# Altium PCB vert.PcbDoc (part 2 of 2)
Units mm, origin at the board's own origin, x right, y up, seen from the top; angles counter-clockwise.
Board outline 145 x 85 mm, 2 copper layers (Top Layer, Bottom Layer); 219 components, 187 nets, 800 pads, 113 vias.
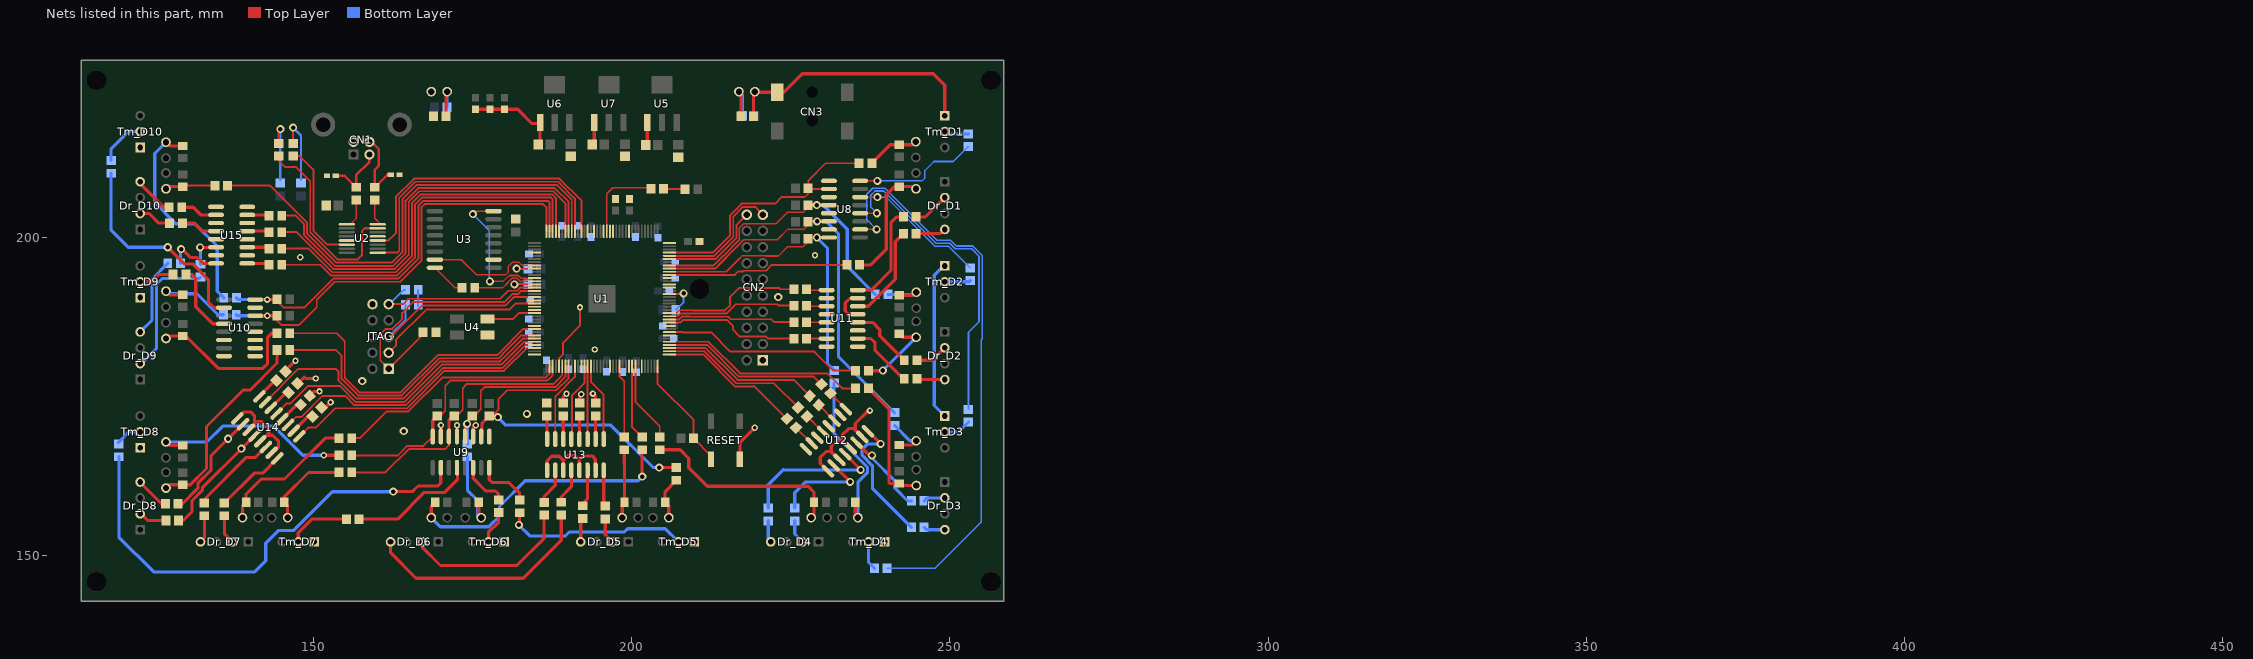
[diagram p2: the nets of this part, all layers, seen from the top]

## Via types
v1: diameter 1, hole 0.5, Top Layer to Bottom Layer, 71 vias
v2: diameter 1.27, hole 0.711, Top Layer to Bottom Layer, 42 vias

## Nets (pads, with @x,y where several pads share a name; then routed paths per layer and width w, separated by ;. In a path a pad name is that pad's centre, name@x,y a point inside that pad or via, vN(x,y) a via of type N, cw(c..) or ccw(c..) an arc to the next point about the centre after c; other vN are vias at no path point) (continued)
CLK: U1.23 U4.3 | length 7.8
  Top Layer w0.3: U4.3@177.325,187.2 181.325,187.2 182.275,188.15 U1.23@184.725,188.15
CONF_DONE: R3.2 U1.92 | length 5.3
  Top Layer w0.3: U1.92@205.925,191.15 v2@208.15,191.15
  Bottom Layer w0.3: R3.2@206.925,188.65 208.15,189.875 v2(208.15,191.25)
DATA0: R2.1 U1.13 | length 10.2
  Top Layer w0.25: R2.1@175.325,192.1 179.7,192.1 180.615,193.015 180.615,193.048 181.177,193.61 181.973,193.61 182.433,193.15 U1.13@184.725,193.15
DCLK: U1.12 U3.16 | length 22.5
  Top Layer w0.25: v2(175.05,203.7) 175.52,204.17 U3.16@178.275,204.17 ; v2(177.7,193.125) 179.786,193.125 180.721,194.06 182.159,194.06 182.569,193.65 U1.12@184.725,193.65
  Bottom Layer w0.25: v2(175.05,203.7) 177.625,201.125 v2@177.625,193.225
dir_1: R24.1 U1.85 | length 20.4
  Top Layer w0.3: U1.85@205.925,187.65 207.239,187.65 207.683,188.094 209.332,188.094 209.357,188.069 214.894,188.069 216.365,189.54 222.9,189.54 223.123,189.317 R24.1@225.475,189.317
dir_2: R31.1 U1.83 | length 21.3
  Top Layer w0.3: U1.83@205.925,186.65 207.653,186.65 208.097,187.094 208.918,187.094 208.943,187.069 214.949,187.069 215.888,186.13 215.888,185.588 217.015,184.46 221.107,184.46 221.417,184.15 R31.1@225.475,184.15
dir_3: R25.1 U1.75 | length 25.2
  Top Layer w0.3: U1.75@205.925,182.65 211.636,182.65 216.65,177.636 225.486,177.636 R25.1@227.979,175.143
dir_4: R32.1 U1.73 | length 22.6
  Top Layer w0.3: U1.73@205.925,181.65 211.218,181.65 216.268,176.6 219.344,176.6 R32.1@224.39,171.554
DIR_5: U1.50 U13.3 | length 11.5
  Top Layer w0.3: U13.3@193.055,168.35 193.05,168.355 193.05,175.852 193.075,175.877 U1.50@193.075,179.8
dir_6: U1.46 U13.7 | length 12.7
  Top Layer w0.3: U13.7@187.975,168.35 187.975,175.025 191.075,178.125 U1.46@191.075,179.8
DIR_7: U1.34 U14.1 | length 42.7
  Top Layer w0.3: U14.1@147.775,168.773 149.152,170.15 150.375,170.15 153.423,173.198 164.705,173.198 170.557,179.05 179.918,179.05 183.518,182.65 U1.34@184.725,182.65
dir_8: U1.31 U14.7 | length 51.2
  Top Layer w0.3: U14.7@142.386,174.161 147.601,179.375 153.5,179.375 153.9,178.975 153.9,177.588 156.789,174.698 164.084,174.698 169.936,180.55 179.296,180.55 180.175,181.429 180.175,181.447 182.878,184.15 U1.31@184.725,184.15
dir_9: R38.1 U1.141 | length 60
  Top Layer w0.3: R38.1@145,198.275 149.236,198.275 152.936,194.575 162.914,194.575 165.46,197.121 165.46,205.424 166.828,206.793 187.493,206.793 188.08,206.205 188.08,205.45 188.075,205.445 U1.141@188.075,201
dir_10: R44.1 U1.137 | length 64.8
  Top Layer w0.3: R44.1@145,203.475 147.175,203.475 148.475,202.175 148.475,200.45 153.35,195.575 162.5,195.575 164.46,197.535 164.46,205.839 166.414,207.793 187.907,207.793 190.075,205.625 U1.137@190.075,201
DIR_H1: R3_D1.1 U11.14 | length 15.4
  Top Layer w0.5: U11.14@235.525,189.23 237.18,189.23 241.425,193.475 241.425,199.375 R3_D1.1@242.7,200.65
DIR_H2: R3_D2.1 U11.10 | length 10.6
  Top Layer w0.5: U11.10@235.525,184.15 237.575,184.15 238.25,183.475 238.25,182.275 242.675,177.85 R3_D2.1@242.825,177.85
DIR_H3: R3_D3.1 U12.16 | length 21.6
  Top Layer w0.5: U12.16@237.132,169.588 v2(239.121,167.6) v2@239.175,167.6
  Bottom Layer w0.5: v2(239.121,167.6) 237.075,167.6 236.212,166.737 236.212,165.781 237.825,164.169 237.825,160.6 R3_D3.1@243.95,154.475
DIR_H4: R3_D4.1 U12.12 | length 22.7
  Top Layer w0.5: U12.12@233.54,165.996 235.962,163.575 v2(235.962,163.508)
  Bottom Layer w0.5: R3_D4.1@221.45,157.5 221.45,161.175 223.825,163.55 223.867,163.508 v2(235.962,163.508)
DIR_H5: R3_D5.1 U13.14 | length 6
  Top Layer w0.5: R3_D5.1@192,157.9 193.055,158.955 U13.14@193.055,163.45
DIR_H6: R3_D6.1 U13.12 | length 5.7
  Top Layer w0.5: R3_D6.1@188.925,158.425 188.925,159.25 190.515,160.84 U13.12@190.515,163.45
DIR_H7: R3_D7.1 U14.14 | length 13.7
  Top Layer w0.5: R3_D7.1@132.85,158.3 132.85,158.9 139.42,165.47 140.88,165.47 U14.14@142.514,167.104
DIR_H8: R3_D8.1 U14.10 | length 17.3
  Top Layer w0.5: R3_D8.1@128.7,158.15 129.375,158.15 131.825,160.6 131.825,161.385 133.875,163.435 133.875,165.725 v2@136.625,168.475 ; v2(136.575,168.4) 138.871,170.696 U14.10@138.922,170.696
DIR_H9: R3_D9.1 U15.16 | length 8.7
  Top Layer w0.5: v2(129.181,198.21) 129.39,198.21 130.725,196.875 131.75,196.875 132.67,195.955 U15.16@134.675,195.955
  Bottom Layer w0.5: R3_D9.1@129.075,195.975 129.075,198.103 v2(129.181,198.21)
DIR_H10: R3_D10.1 U15.10 | length 5.9
  Top Layer w0.5: R3_D10.1@129.275,204.775 131.075,204.775 132.275,203.575 U15.10@134.675,203.575
FT_RxLed: RX.1 U2.14 | length 20.4
  Top Layer w0.3: RX.1@146.77,212.865 RX.1@146.77,212.815 147.86,212.815 149.975,210.7 149.975,201.071 152.136,198.91 U2.14@155.75,198.91
FT_TxLed: TX.1 U2.7 | length 32.1
  Top Layer w0.3: TX.1@144.52,212.815 144.52,212.08 145.513,211.088 147.238,211.088 149.475,208.85 149.475,200.864 153.739,196.6 156.975,196.6 157.6,197.225 157.6,201.025 158.037,201.462
  Top Layer w0.381: 158.037,201.462 U2.7@160.075,201.462 ; U2.7@160.075,201.45 U2.7@160.6,201.45
FTDI_RX: U1.133 U2.4 | length 45.1
  Top Layer w0.3: U2.4@160.6,199.545 161.727,199.545 162.067,199.885 162.09,199.885 162.94,200.735 162.94,206.44 165.793,209.293 188.632,209.293 192.075,205.85 U1.133@192.075,201
FTDI_TX: U1.135 U2.1 | length 46.2
  Top Layer w0.3: U2.1@160.6,197.64 163.15,197.64 163.46,197.95 163.46,206.253 166,208.793 188.425,208.793 191.075,206.143 U1.135@191.075,201
GND: C1.2 C2.2 C3.2 C4.2 C5.2 C18.2 C19.1 C20.2 C21.2 C22.1 C23.2 C24.2 C25.2 C26.2 C27.2 C28.2 C29.1 C30.2 C31.1 C32.2 C33.2 C34.1 C35.1 C36.1 C37.2 C38.1 C39.1 C40.1 C41.1 C42.1 C43.1 C44.1 C45.1 C46.1 C47.1 C48.1 CN1.4 CN2.1 JTAG.10 LD_PWR_5.2 LD_PWR_5_n.2 R7.1 R20.2 R23.1 R26.1 R30.1 R33.1 R34.1 R37.1 R40.1 R43.1 RESET.1 U1.4 U1.19 U1.21 U1.22 U1.27 U1.36 U1.41 U1.48 U1.57 U1.63 U1.79 U1.82 U1.94 U1.95 U1.97 U1.108 U1.118 U1.123 U1.131 U1.140 U2.5 U2.13 U3.10 U4.2 U5.1 U6.1 U7.1 U8.9 U8.11 U8.13 U8.15 U9.9 U9.11 U9.13 U9.15 U10.9 U10.11 U10.15 U11.2 U11.4 U11.6 U11.8 U12.2 U12.4 U12.6 U12.8 U15.2 U15.4 U15.6 U15.8 | length 58.5
  Top Layer w0.3: U1.41@188.575,179.8 188.575,181.075 188.6,181.075 189.2,181.675 189.2,183.525 191.875,186.2 v1(191.875,189.05)
  Top Layer w0.5: R43.1@145.565,178.991 145.565,179.065 v1(147.15,180.65) ; R40.1@147.492,177.064 148.528,178.1 148.753,177.875 v1(150.35,177.875) ; R37.1@149.401,175.154 150.097,175.85 v1(150.925,175.85) ; R34.1@151.257,173.298 151.823,173.298 v1(152.675,174.15) ; U9.15@170,168.75 170.008,168.758 v1(170.008,170.533) v1@170.008,170.617 ; v1@172.533,170.617 v1(172.533,170.533) 172.533,168.757 U9.13@172.54,168.75 ; U9.11@175.08,168.75 175.08,170.105 v1(175.5,170.525) ; C1.2@175.475,220.175 C2.2@177.725,220.175 C3.2@179.975,220.175 182.075,220.175 184.325,217.925 U6.1@185.6,217.925 ; C26.2@185.275,214.625 185.6,214.95 U6.1@185.6,217.925 ; U6.1@185.625,217.925 U6.1@185.6,217.925 ; R30.1@189.25,174 189.25,174.975 v1(189.75,175.475) ; R26.1@191.8,174 191.8,175.125 v1(192.075,175.4) ; C24.2@193.8,214.625 194.1,214.925 U7.1@194.1,218.125 ; v1(193.9,175.5) 194.325,175.075 R23.1@194.325,174 ; C5.2@202.175,214.55 202.45,214.825 U5.1@202.45,218.125 U5.1@202.45,218.425 ; RESET.1@217,165.15 217,167.8 v1(219.325,170.125)
  other v1: 194.2,182.425 147.9,196.925 228.8,197.25
  other v2: 164.175,169.6 183.525,172.3 157.65,177.45 223.025,190.675
GND_H: CN3.1 LD_PWR_12.2 LD_PWR_12_n.2 Tm_D1.1 Tm_D2.1 Tm_D3.1 Tm_D4.1 Tm_D5.1 Tm_D6.1 Tm_D7.1 Tm_D8.1 Tm_D9.1 Tm_D10.1 U11.9 U11.11 U11.13 U11.15 U12.9 U12.11 U12.13 U12.15 U13.9 U13.11 U13.13 U13.15 U14.9 U14.11 U14.13 U14.15 U15.9 U15.11 U15.13 U15.15 | length 127.3
  Top Layer w0.5: U14.9@138.024,171.594 139.055,172.625 140.1,172.625 140.7,172.025 140.7,170.7 U14.11@139.85,169.85 ; U14.11@139.82,169.798 141.097,171.075 141.9,171.075 143,169.975 143,169.325 142.625,168.95 143.55,168.95 144.5,168 144.5,167.15 U14.15@143.875,166.525 ; U13.9@186.705,163.45 186.705,164.955 187.4,165.65 188.6,165.65 189.245,165.005 ; U13.11@189.245,163.45 189.245,165.005 ; U13.11@189.275,163.2 U13.11@189.275,163.45 ; U13.13@191.725,163.4 191.725,165.15 191.125,165.75 189.975,165.75 189.245,165.02 189.245,165.005 ; U13.13@191.785,163.45 191.785,165.185 192.3,165.7 193.775,165.7 194.275,165.2 U13.15@194.275,163.35 ; LD_PWR_12.2@219.15,219.1 219.15,222.75 LD_PWR_12_n.2@219.35,222.95 219.45,222.85 CN3.1@222.875,222.85 223.875,222.85 226.8,225.775 247.4,225.775 249.2,223.975 Tm_D1.1@249.2,219.175 ; U12.9@230.846,163.302 229.625,164.523 229.625,165.475 230.525,166.375 231.275,166.375 U12.11@232.35,165.3 ; U12.11@232.642,165.098 231.35,166.39 231.35,167.2 232.2,168.05 233.282,168.05 ; U12.13@234.438,166.894 233.282,168.05 ; U11.15@235.175,190.45 234.25,190.45 233.55,189.75 233.55,188.475 234.065,187.96 U11.13@235.525,187.96 ; U12.15@236.05,168.85 234.9,170 234.1,170 233.1,169 233.1,168.232 233.282,168.05 ; U12.15@236.234,168.69 235.125,169.8 235.125,170.8 237.15,172.825 v1(237.425,172.825)
  Bottom Layer w0.5: Tm_D2.1@249.1,195.725 249.1,195.65 247.55,194.1 247.55,173.625 Tm_D3.1@249.2,171.975
GPIO0: CN2.20 U1.103 | length 16
  Top Layer w0.3: U1.103@206.2,196.65 213.164,196.65 216.455,199.941 216.455,201.98 CN2.20@218.08,203.605
GPIO1: CN2.19 U1.104 | length 20.3
  Top Layer w0.3: U1.104@205.925,197.15 212.957,197.15 215.955,200.148 215.955,203.323 217.482,204.85 219.375,204.85 CN2.19@220.62,203.605
JTAG_TCK: JTAG.1 R20.1 U1.16 | length 41.6
  Top Layer w0.3: R20.1@167.225,185.125 167.225,184.825 JTAG.1@161.795,179.395 160.475,180.715 160.475,184.817 161.308,185.65 162.375,185.65 163.925,187.2 163.925,188.15 165.675,189.9 180.018,189.9 181.283,191.165 182.19,191.165 182.675,191.65 U1.16@184.725,191.65
JTAG_TDI: JTAG.9 R17.1 U1.15 | length 27.8
  Top Layer w0.3: JTAG.9@161.795,189.555 164.055,189.555 164.9,190.4 179.35,190.4 180.615,191.665 181.983,191.665 182.468,192.15 U1.15@184.725,192.15
  Bottom Layer w0.3: JTAG.9@161.75,189.4 JTAG.9@161.905,189.555 ; JTAG.9@161.795,189.555 JTAG.9@161.905,189.555 ; R17.1@164.4,191.8 164.15,191.8 JTAG.9@161.905,189.555
JTAG_TDO: JTAG.3 U1.20 | length 26.6
  Top Layer w0.3: JTAG.3@161.795,181.935 161.835,181.935 162.95,183.05 162.95,183.925 167.725,188.7 180.75,188.7 181.7,189.65 U1.20@184.725,189.65
JTAG_TMS: JTAG.5 R6.1 U1.18 | length 31.3
  Top Layer w0.3: JTAG.5@161.795,184.475 162.2,184.475 167.075,189.35 180.175,189.35 181.475,190.65 U1.18@184.725,190.65
  Bottom Layer w0.3: JTAG.5@162,184.675 164.45,187.125 R6.1@164.45,189.425
LED_DR1: R14_D1.1 U1.98 | length 28.6
  Top Layer w0.3: U1.98@205.925,194.15 216.2,194.15 216.75,194.7 217.483,194.7 217.593,194.81 221.107,194.81 222.022,195.725 R14_D1.1@233.825,195.725
LED_DR2: R14_D2.1 U1.80 | length 31.8
  Top Layer w0.3: U1.80@205.925,185.15 208.051,185.15 208.082,185.119 212.481,185.119 215.49,182.11 228.7,182.11 231.71,179.1 R14_D2.1@235.2,179.1
LED_DR3: R14_D3.1 U1.77 | length 32.3
  Top Layer w0.3: U1.77@205.925,183.65 212.05,183.65 217.043,178.657 230.718,178.657 233.05,176.325 R14_D3.1@235.2,176.325
LED_DR4: R14_D4.1 U1.65 | length 12.7
  Top Layer w0.3: U1.65@200.575,179.8 200.575,174.225 204.4,170.4 R14_D4.1@204.4,168.675
LED_DR5: R14_D5.1 U1.60 | length 11.4
  Top Layer w0.3: U1.60@198.075,179.8 198.075,178.2 198.825,177.45 R14_D5.1@198.825,168.675
LED_DR6: R14_D6.1 U1.64 | length 11.8
  Top Layer w0.3: U1.64@200.075,179.8 200.075,170.225 R14_D6.1@201.625,168.675
LED_DR7: R14_D7.1 U1.38 | length 36.5
  Top Layer w0.3: R14_D7.1@156,168.5 157.275,168.5 161.473,172.698 164.912,172.698 170.239,178.025 186.5,178.025 187.075,178.6 U1.38@187.075,179.8
LED_DR8: R14_D8.1 U1.30 | length 47.5
  Top Layer w0.3: R14_D8.1@146.25,182.35 153.5,182.35 154.4,181.45 154.4,177.795 156.997,175.198 163.877,175.198 169.728,181.05 179.089,181.05 179.675,181.636 179.675,181.654 182.671,184.65 U1.30@184.725,184.65
LED_DR9: R14_D9.1 U1.28 | length 49.8
  Top Layer w0.3: R14_D9.1@146.25,184.975 153.625,184.975 154.9,183.7 154.9,178.002 157.204,175.698 163.67,175.698 169.521,181.55 178.882,181.55 179.175,181.843 179.175,181.861 182.964,185.65 U1.28@184.725,185.65
LED_DR10: R14_D10.1 U1.136 | length 76
  Top Layer w0.3: R14_D10.1@136.475,208.175 143.182,208.175 148.975,202.382 148.975,200.657 153.557,196.075 162.292,196.075 163.96,197.743 163.96,206.046 166.207,208.293 188.218,208.293 190.575,205.936 U1.136@190.575,201
led_dr11: U1.129
led_dr12: U1.124
LPC1758_LED0: R15.1 U1.125 | length 13.3
  Top Layer w0.3: U1.125@196.075,201 196.075,206.875 197.05,207.85 202.825,207.85 R15.1@203,207.675
NCONFIG: R4.2 U1.14 | length 5.3
  Top Layer w0.25: v2(181.575,192.65) U1.14@184.725,192.65
  Bottom Layer w0.25: v2(181.575,192.65) R4.2@183.725,192.65
NCSO: U1.8 U3.7 | length 18.1
  Top Layer w0.25: U3.7@169.075,196.55 173.2,196.55 175.55,194.2 180.225,194.2 180.625,194.6 180.625,195.5 181.235,196.11 182.298,196.11 182.758,195.65 U1.8@184.725,195.65
NetACT_D1_2: ACT_D1.2 ACT_n_D1.2 R14_D1.2 | length 19.1
  Top Layer w0.5: R14_D1.2@235.825,195.725 237.55,195.725 240,198.175 240,206.754 241.271,208.025 ACT_D1.2@242.05,208.025 244.325,208.025 ACT_n_D1.2@244.675,207.675
NetACT_D2_2: ACT_D2.2 ACT_n_D2.2 R14_D2.2 | length 12
  Top Layer w0.5: R14_D2.2@237.2,179.1 v2@239.175,179.1 ; ACT_D2.2@242.05,184.9 242.6,184.35 ACT_n_D2.2@244.425,184.35
  Bottom Layer w0.5: v2(239.475,179.125) ACT_n_D2.2@244.7,184.35
NetACT_D3_2: ACT_D3.2 ACT_n_D3.2 R14_D3.2 | length 20.6
  Top Layer w0.5: R14_D3.2@237.2,176.325 240.425,173.1 240.425,161.5 240.55,161.375 ACT_D3.2@242.05,161.375 242.375,161.05 ACT_n_D3.2@244.725,161.05
NetACT_D4_2: ACT_D4.2 ACT_n_D4.2 R14_D4.2 | length 32.1
  Top Layer w0.5: R14_D4.2@204.4,166.675 207.6,166.675 208.975,165.3 208.975,163.85 211.9,160.925 227.725,160.925 228.65,160 ACT_D4.2@228.65,158.45 228.65,156.45 ACT_n_D4.2@228.2,156
NetACT_D5_2: ACT_D5.2 ACT_n_D5.2 R14_D5.2 | length 10
  Top Layer w0.5: ACT_n_D5.2@198.5,156 198.5,158.1 ACT_D5.2@198.85,158.45 198.85,164.4 198.825,164.425 198.825,165.825
NetACT_D6_2: ACT_D6.2 ACT_n_D6.2 R14_D6.2 | length 45.2
  Top Layer w0.5: ACT_n_D6.2@168.5,156 168.5,157.825 ACT_D6.2@169.125,158.45 ; R14_D6.2@201.625,166.675 201.625,162.475 v2(201.65,162.45)
  Bottom Layer w0.5: ACT_n_D6.2@168.5,156 169.925,154.575 177.55,154.575 179.225,156.25 179.225,157.75 183.275,161.8 201,161.8 v2(201.65,162.45) ; ACT_n_D6.2@168.6,156 ACT_n_D6.2@168.9,156.3
NetACT_D7_2: ACT_D7.2 ACT_n_D7.2 R14_D7.2 | length 21.4
  Top Layer w0.5: ACT_n_D7.2@138.825,156 ACT_D7.2@138.825,157.875 ; ACT_D7.2@139.4,158.45 139.4,159.725 141.75,162.075 145.425,162.075 151.85,168.5 R14_D7.2@154,168.5
NetACT_D8_2: ACT_D8.2 ACT_n_D8.2 R14_D8.2 | length 31.5
  Top Layer w0.5: ACT_n_D8.2@126.8,160.65 127.325,161.175 ACT_D8.2@129.45,161.175 130.625,161.175 133.175,163.725 133.175,170.325 138.9,176.05 140,176.05 144.25,180.3 R14_D8.2@144.25,182.35
NetACT_D9_2: ACT_D9.2 ACT_n_D9.2 R14_D9.2 | length 24.4
  Top Layer w0.5: ACT_n_D9.2@126.8,184.15 127.2,184.55 ACT_D9.2@129.45,184.55 129.9,184.55 135,179.45 142,179.45 142.775,180.225 142.775,184.325 143.425,184.975 R14_D9.2@144.25,184.975
NetACT_D10_2: ACT_D10.2 ACT_n_D10.2 R14_D10.2 | length 8.5
  Top Layer w0.3: ACT_D10.2@129.45,208.025 129.6,208.175 R14_D10.2@134.475,208.175
  Top Layer w0.5: ACT_n_D10.2@126.8,207.675 127.15,208.025 ACT_D10.2@129.45,208.025
  Bottom Layer w0.5: ACT_n_D10.2@126.8,207.675 ACT_n_D10.2@127.225,208.1
NetDr_D1_2: Dr_D1.2 R2_D1.2 | length 6.1
  Top Layer w0.5: R2_D1.2@244.7,203.275 246.175,203.275 Dr_D1.2@249.2,206.3
  Bottom Layer w0.25: Dr_D1.2@248.85,206.3 Dr_D1.2@249.2,206.3
NetDr_D1_4: Dr_D1.4 R3_D1.2 | length 4.8
  Top Layer w0.5: R3_D1.2@244.7,200.65 248.55,200.65 Dr_D1.4@249.2,201.3
NetDr_D2_2: Dr_D2.2 R2_D2.2 | length 5.2
  Top Layer w0.5: R2_D2.2@244.825,180.75 247.25,180.75 Dr_D2.2@249.2,182.7
NetDr_D2_4: Dr_D2.4 R3_D2.2 | length 4.4
  Top Layer w0.5: R3_D2.2@244.825,177.85 244.975,177.7 Dr_D2.4@249.2,177.7
NetDr_D3_2: Dr_D3.2 R2_D3.2 | length 3.4
  Bottom Layer w0.5: R2_D3.2@245.95,158.625 246.425,159.1 Dr_D3.2@249.2,159.1
NetDr_D3_4: Dr_D3.4 R3_D3.2 | length 3.4
  Bottom Layer w0.5: R3_D3.2@245.95,154.475 246.325,154.1 Dr_D3.4@249.2,154.1
NetDr_D4_2: Dr_D4.2 R2_D4.2 | length 3.8
  Bottom Layer w0.5: R2_D4.2@225.625,155.5 225.625,153.425 Dr_D4.2@226.85,152.2
NetDr_D4_4: Dr_D4.4 R3_D4.2 | length 3.5
  Bottom Layer w0.5: R3_D4.2@221.45,155.5 221.45,152.6 Dr_D4.4@221.85,152.2
NetDr_D5_2: Dr_D5.2 R2_D5.2 | length 4.1
  Top Layer w0.5: R2_D5.2@195.85,155.8 195.85,153.325 Dr_D5.2@196.975,152.2
NetDr_D5_4: Dr_D5.4 R3_D5.2 | length 3.8
  Top Layer w0.5: Dr_D5.4@191.975,152.25 Dr_D5.4@191.975,152.2 192,152.225 R3_D5.2@192,155.9
NetDr_D6_2: Dr_D6.2 R2_D6.2 | length 26.6
  Top Layer w0.5: Dr_D6.2@167.1,152.2 167.1,151.325 169.95,148.475 181.95,148.475 186.225,152.75 R2_D6.2@186.225,156.4
NetDr_D6_4: Dr_D6.4 R3_D6.2 | length 36.6
  Top Layer w0.5: Dr_D6.4@162.1,152.2 162.1,150.475 166.1,146.475 182.925,146.475 188.925,152.475 R3_D6.2@188.925,156.425
NetDr_D7_2: Dr_D7.2 R2_D7.2 | length 4.6
  Top Layer w0.5: R2_D7.2@135.975,156.3 135.975,153.45 Dr_D7.2@137.225,152.2
NetDr_D7_4: Dr_D7.4 R3_D7.2 | length 4.4
  Top Layer w0.5: Dr_D7.4@132.225,152.2 132.85,152.825 R3_D7.2@132.85,156.3
NetDr_D8_2: Dr_D8.2 R2_D8.2 | length 4.3
  Top Layer w0.5: Dr_D8.2@122.9,156.575 123.925,155.55 R2_D8.2@126.8,155.55
NetDr_D8_4: Dr_D8.4 R3_D8.2 | length 5.4
  Top Layer w0.5: Dr_D8.4@122.725,161.575 126.15,158.15 R3_D8.2@126.7,158.15
NetDr_D9_2: Dr_D9.2 R2_D9.2 | length 20.9
  Bottom Layer w0.5: Dr_D9.2@122.75,180.2 122.925,180.2 125.3,182.575 125.3,192.65 126.25,193.6 132.025,193.6 R2_D9.2@132.175,193.75
NetDr_D9_4: Dr_D9.4 R3_D9.2 | length 12.6
  Bottom Layer w0.5: Dr_D9.4@122.75,185.2 124.6,187.05 124.6,193.5 R3_D9.2@127.075,195.975
NetDr_D10_2: Dr_D10.2 R2_D10.2 | length 5.2
  Top Layer w0.5: Dr_D10.2@122.75,203.8 124.15,203.8 125.65,202.3 R2_D10.2@127.375,202.3
NetDr_D10_4: Dr_D10.4 R3_D10.2 | length 6.4
  Top Layer w0.5: Dr_D10.4@122.75,208.8 122.75,208.475 126.45,204.775 R3_D10.2@127.275,204.775
NetLD1_2: LD1.2 R15.2 | length 3.4
  Top Layer w0.3: R15.2@205,207.675 208.325,207.675 LD1.2@208.375,207.625
NetLD_PWR_5_1: LD_PWR_5.1 LD_PWR_5_n.1 R16.1 | length 6.4
  Top Layer w0.5: LD_PWR_5.1@170.825,219.1 170.825,222.775 LD_PWR_5_n.1@171,222.95
  Bottom Layer w0.5: R16.1@170.975,220.525 170.975,222.925 LD_PWR_5_n.1@171,222.95
NetLD_PWR_12_1: LD_PWR_12.1 LD_PWR_12_n.1 R8.1 | length 8
  Top Layer w0.5: LD_PWR_12_n.1@216.85,222.95 217.15,222.65 LD_PWR_12.1@217.15,219.1
  Bottom Layer w0.5: LD_PWR_12_n.1@216.85,222.95 217.4,222.4 R8.1@217.4,219.15
NetR2_2: R2.2 U3.8 | length 5.6
  Top Layer w0.25: U3.8@169.075,195.28 172.255,192.1 R2.2@173.325,192.1
NetR10_2: R10.2 TX.2 | length 10.4
  Top Layer w0.381: TX.2@144.52,214.765 144.52,216.815 v2(144.77,217.065)
  Bottom Layer w0.381: R10.2@144.77,209.115 v2(144.77,217.065)
NetR11_D1_2: R11_D1.2 Tm_D1.2 | length 4
  Top Layer w0.25: Tm_D1.2@249.1,216.675 Tm_D1.2@249.175,216.675
  Bottom Layer w0.25: Tm_D1.2@249.175,216.675 Tm_D1.2@249.2,216.675
  Bottom Layer w0.5: Tm_D1.2@249.2,216.675 249.575,216.3 R11_D1.2@252.925,216.3
NetR11_D2_2: R11_D2.2 Tm_D2.2 | length 4.2
  Top Layer w0.25: Tm_D2.2@249.1,193.075 Tm_D2.2@249.175,193.075
  Bottom Layer w0.25: Tm_D2.2@249.175,193.075 Tm_D2.2@249.2,193.075
  Bottom Layer w0.5: Tm_D2.2@249.2,193.075 253.025,193.075 R11_D2.2@253.2,193.25
NetR11_D3_2: R11_D3.2 Tm_D3.2 | length 4.5
  Top Layer w0.25: Tm_D3.2@249.1,169.475 Tm_D3.2@249.175,169.475
  Bottom Layer w0.25: Tm_D3.2@249.175,169.475 Tm_D3.2@249.2,169.475
  Bottom Layer w0.5: Tm_D3.2@249.2,169.475 251.375,169.475 R11_D3.2@252.925,171.025
NetR11_D4_2: R11_D4.2 Tm_D4.2 | length 4.7
  Top Layer w0.25: Tm_D4.2@237.225,152.275 Tm_D4.2@237.225,152.35
  Bottom Layer w0.25: Tm_D4.2@237.225,152.2 Tm_D4.2@237.225,152.275
  Bottom Layer w0.5: Tm_D4.2@237.225,152.2 237.225,148.95 R11_D4.2@238.15,148.025
NetR11_D5_2: R11_D5.2 Tm_D5.2 | length 29.3
  Top Layer w0.25: Tm_D5.2@207.35,152.275 Tm_D5.2@207.35,152.35
  Top Layer w0.5: v2(182.275,154.85) 182.375,154.95 R11_D5.2@182.375,156.775
  Bottom Layer w0.25: Tm_D5.2@207.35,152.2 Tm_D5.2@207.35,152.275
  Bottom Layer w0.5: v2(182.275,154.85) 184,153.125 189.6,153.125 ; 189.575,153.1 189.6,153.125 ; Tm_D5.2@207.35,152.2 205.3,154.25 199.35,154.25 198.837,153.738 190.212,153.738 189.6,153.125
NetR11_D6_2: R11_D6.2 Tm_D6.2 | length 5.3
  Top Layer w0.5: Tm_D6.2@177.475,152.2 177.475,153.7 179.075,155.3 R11_D6.2@179.075,156.8
NetR11_D7_2: R11_D7.2 Tm_D7.2 | length 9.9
  Top Layer w0.5: Tm_D7.2@147.6,152.2 147.6,153.65 149.725,155.775 R11_D7.2@155.15,155.775
  Bottom Layer w0.25: Tm_D7.2@147.6,152.2 Tm_D7.2@147.6,152.225
NetR11_D8_2: R11_D8.2 Tm_D8.2 | length 4.2
  Bottom Layer w0.5: R11_D8.2@119.275,167.8 120.95,169.475 Tm_D8.2@122.75,169.475
NetR11_D9_2: R11_D9.2 Tm_D9.2 | length 5.7
  Top Layer w0.5: Tm_D9.2@122.75,193.075 124.625,193.075 125.775,194.225 R11_D9.2@127.925,194.225
NetR11_D10_2: R11_D10.2 Tm_D10.2 | length 7.6
  Top Layer w0.25: Tm_D10.2@122.9,216.575 Tm_D10.2@122.975,216.575
  Bottom Layer w0.5: R11_D10.2@118.175,212.125 118.175,213.95 120.9,216.675 Tm_D10.2@122.75,216.675
NetR13_2: R13.2 RX.2 | length 11.3
  Top Layer w0.381: RX.2@146.77,214.765 RX.2@146.77,214.815 v2(146.77,217.315)
  Bottom Layer w0.381: v2(146.77,217.315) 148.02,216.065 R13.2@148.02,209.115
NetR18_1: R18.1 U2.8 | length 4.2
  Top Layer w0.25: R18.1@159.625,205.925 159.625,203.06 U2.8@160.6,202.085
NetR19_1: R19.1 U2.9 | length 4.2
  Top Layer w0.25: U2.9@155.75,202.085 156.675,203.01 R19.1@156.675,205.925
NetR21_2: R21.2 U11.1 | length 3.2
  Top Layer w0.25: R21.2@227.475,191.9 227.605,191.77 U11.1@230.625,191.77
NetR22_2: R22.2 U12.1 | length 3.5
  Top Layer w0.3: R22.2@231.214,175.549 233.667,173.096 U12.1@233.667,173.053
NetR23_2: R23.2 U13.2 | length 3.6
  Top Layer w0.5: U13.2@194.325,168.35 R23.2@194.325,172
NetR24_2: R24.2 U11.3 | length 3.2
  Top Layer w0.25: R24.2@227.475,189.317 227.562,189.23 U11.3@230.625,189.23
NetR25_2: R25.2 U12.3 | length 3.5
  Top Layer w0.3: R25.2@229.393,173.728 231.864,171.257 U12.3@231.871,171.257
NetR26_2: R26.2 U13.4 | length 3.6
  Top Layer w0.3: U13.4@191.785,168.35 U13.4@191.785,168.365
  Top Layer w0.5: U13.4@191.8,168.365 R26.2@191.8,172
NetR27_2: R27.2 U11.5 | length 3.2
  Top Layer w0.25: R27.2@227.475,186.733 227.518,186.69 U11.5@230.625,186.69
NetR28_D1_2: R28_D1.2 T_D1.2 T_n_D1.2 | length 8.3
  Top Layer w0.5: R28_D1.2@237.75,211.725 240.625,214.6 T_D1.2@242.05,214.6 244.15,214.6 T_n_D1.2@244.65,215.1
NetR28_D2_2: R28_D2.2 T_D2.2 T_n_D2.2 | length 7.5
  Top Layer w0.5: T_D2.2@242.05,190.95 244.25,190.95 T_n_D2.2@244.725,191.425
  Bottom Layer w0.5: R28_D2.2@240.275,191.075 244.375,191.075 T_n_D2.2@244.725,191.425
NetR28_D3_2: R28_D3.2 T_D3.2 T_n_D3.2 | length 7.3
  Top Layer w0.5: T_D3.2@242.05,167.425 244.05,167.425 T_n_D3.2@244.7,168.075
  Bottom Layer w0.5: R28_D3.2@241.3,170.5 243.725,168.075 T_n_D3.2@244.7,168.075
NetR28_D4_2: R28_D4.2 T_D4.2 T_n_D4.2 | length 26.6
  Top Layer w0.5: T_D4.2@235.125,158.45 235.125,156.425 T_n_D4.2@235.55,156
  Bottom Layer w0.5: R28_D4.2@231.8,177.15 231.8,169.204 237.047,163.957 237.047,163.059 235.55,161.562 T_n_D4.2@235.55,156
NetR28_D5_2: R28_D5.2 T_D5.2 T_n_D5.2 | length 6.8
  Top Layer w0.5: T_n_D5.2@205.825,156 205.825,157.875 T_D5.2@205.25,158.45 205.25,160.1 R28_D5.2@207.025,161.875
NetR28_D6_2: R28_D6.2 T_D6.2 T_n_D6.2 | length 12.7
  Top Layer w0.5: T_D6.2@175.95,158.45 175.95,156.375 T_n_D6.2@176.325,156
  Bottom Layer w0.5: R28_D6.2@174.175,165.575 174.175,160.325 175.8,158.7 T_n_D6.2@175.8,156.125
NetR28_D7_2: R28_D7.2 T_D7.2 T_n_D7.2 | length 13.7
  Top Layer w0.5: T_n_D7.2@145.925,156 145.925,157.925 T_D7.2@145.4,158.45 145.4,159.3 149.2,163.1 R28_D7.2@154,163.1
NetR28_D8_2: R28_D8.2 T_D8.2 T_n_D8.2 | length 35.6
  Top Layer w0.5: T_n_D8.2@126.8,167.9 127.35,167.35 T_D8.2@129.45,167.35 ; v1(151.6,165.8) R28_D8.2@154,165.8
  Bottom Layer w0.5: 129.35,167.875 126.825,167.875 T_n_D8.2@126.8,167.9 133.25,167.9 135.743,170.393 143.732,170.393 148.325,165.8 v1(151.6,165.8)
NetR28_D9_2: R28_D9.2 T_D9.2 T_n_D9.2 | length 13.5
  Top Layer w0.5: T_n_D9.2@126.8,191.6 127.375,191.025 T_D9.2@129.45,191.025
  Bottom Layer w0.5: T_n_D9.2@126.8,191.6 127.225,191.175 131.675,191.175 134.975,187.875 R28_D9.2@135.85,187.875
NetR28_D10_2: R28_D10.2 T_D10.2 T_n_D10.2 | length 34.4
  Top Layer w0.5: T_n_D10.2@126.8,215 127.375,214.425 T_D10.2@129.45,214.425
  Bottom Layer w0.5: T_n_D10.2@126.8,215 125.025,213.225 125.025,205.525 128.35,202.2 131.35,202.2 134.85,198.7 ; 134.9,198.65 134.85,198.7 ; R28_D10.2@135.875,190.55 134.85,191.575 134.85,198.7
NetR29_2: R29.2 U12.5 | length 3.5
  Top Layer w0.3: R29.2@227.572,171.908 230.019,169.461 U12.5@230.075,169.461
NetR30_2: R30.2 U13.6 | length 3.6
  Top Layer w0.3: U13.6@189.245,168.35 U13.6@189.245,168.355
  Top Layer w0.5: U13.6@189.25,168.355 R30.2@189.25,172
NetR31_2: R31.2 U11.7 | length 3.1
  Top Layer w0.25: R31.2@227.475,184.15 U11.7@230.625,184.15
NetR32_2: R32.2 U12.7 | length 3.5
  Top Layer w0.3: R32.2@225.804,170.14 U12.7@228.279,167.665
NetR33_2: R33.2 U13.8 | length 3.6
  Top Layer w0.3: U13.8@186.705,168.35 U13.8@186.705,168.38
  Top Layer w0.5: U13.8@186.675,168.38 R33.2@186.675,172
NetR34_2: R34.2 U14.2 | length 3.9
  Top Layer w0.5: U14.2@146.877,169.671 149.09,171.884 R34.2@149.843,171.884
NetR35_2: R35.2 U15.1 | length 3.5
  Top Layer w0.5: U15.1@139.575,195.955 142.795,195.955 R35.2@143,195.75
NetR37_2: R37.2 U14.4 | length 3.8
  Top Layer w0.5: U14.4@145.081,171.467 147.354,173.74 R37.2@147.987,173.74
NetR38_2: R38.2 U15.3 | length 3.5
  Top Layer w0.5: U15.3@139.575,198.495 142.78,198.495 R38.2@143,198.275
NetR40_2: R40.2 U14.6 | length 3.8
  Top Layer w0.5: U14.6@143.284,173.263 145.671,175.649 R40.2@146.078,175.649
NetR41_2: R41.2 U15.5 | length 3.5
  Top Layer w0.5: U15.5@139.575,201.035 142.84,201.035 R41.2@143,200.875
NetR43_2: R43.2 U14.8 | length 3.9
  Top Layer w0.5: U14.8@141.633,175.059 U14.8@141.488,175.059 144.006,177.576 R43.2@144.151,177.576
NetR44_2: R44.2 U15.7 | length 3.5
  Top Layer w0.5: U15.7@139.575,203.575 142.9,203.575 R44.2@143,203.475
NSTATUS: R5.2 U1.9 | length 4.6
  Top Layer w0.25: v2(181.9,195.15) U1.9@184.725,195.15
  Bottom Layer w0.25: v2(181.9,195.15) R5.2@183.725,195.15
RESET: R12.1 RESET.3 U1.72 | length 18.1
  Top Layer w0.3: U1.72@204.075,179.8 204.075,177 209.725,171.35 R12.1@209.725,168.475 212.45,165.75 RESET.3@212.45,165.175
step_1: R21.1 U1.86 | length 22
  Top Layer w0.3: U1.86@205.925,188.15 207.032,188.15 207.476,188.594 209.539,188.594 209.564,188.569 214.65,188.569 215.475,189.394 215.475,190.7 216.855,192.08 223.2,192.08 223.38,191.9 R21.1@225.475,191.9
step_2: R27.1 U1.84 | length 20.1
  Top Layer w0.3: U1.84@205.925,187.15 207.446,187.15 207.89,187.594 209.125,187.594 209.15,187.569 215.156,187.569 215.55,187.175 221.925,187.175 222.367,186.733 R27.1@225.475,186.733
step_3: R22.1 U1.76 | length 26.4
  Top Layer w0.3: U1.76@205.925,183.15 211.843,183.15 216.836,178.157 228.607,178.157 R22.1@229.8,176.963
step_4: R29.1 U1.74 | length 23.9
  Top Layer w0.3: U1.74@205.925,182.15 211.425,182.15 216.45,177.125 222.355,177.125 R29.1@226.158,173.322
STEP_5: U1.51 U13.1 | length 12.3
  Top Layer w0.3: U1.51@193.575,179.8 193.575,177.345 195.595,175.325 U13.1@195.595,168.35 U13.1@195.575,168.37
step_6: U1.49 U13.5 | length 12.3
  Top Layer w0.3: U13.5@190.515,168.35 190.6,168.435 190.6,175.175 192.575,177.15 U1.49@192.575,179.8
STEP_7: U1.33 U14.3 | length 45.1
  Top Layer w0.3: U14.3@145.979,170.569 147.26,171.85 148.127,171.85 151.402,175.125 154.949,175.125 156.375,173.698 164.498,173.698 170.35,179.55 179.711,179.55 183.311,183.15 U1.33@184.725,183.15
step_8: U1.32 U14.5 | length 47.3
  Top Layer w0.3: U14.5@144.182,172.365 145.735,173.917 146.342,173.917 149.125,176.7 154.081,176.7 156.582,174.198 164.291,174.198 170.143,180.05 179.503,180.05 180.675,181.222 180.675,181.239 183.086,183.65 U1.32@184.725,183.65
step_9: R35.1 U1.142 | length 58.3
  Top Layer w0.3: R35.1@145,195.75 151.053,195.75 152.728,194.075 163.121,194.075 165.96,196.914 165.96,205.217 167.036,206.293 187.286,206.293 187.575,206.004 U1.142@187.575,201
step_10: R41.1 U1.138 | length 62.1
  Top Layer w0.3: R41.1@145,200.875 147.343,200.875 153.143,195.075 162.707,195.075 164.96,197.328 164.96,205.632 166.621,207.293 187.7,207.293 189.575,205.418 189.575,203.4 U1.138@189.575,201
step_11: U1.126
step_12: U1.67
STEP_H1: R2_D1.1 U11.16 | length 16.4
  Top Layer w0.5: U11.16@235.525,191.77 237.65,191.77 240.725,194.845 240.725,202.375 241.625,203.275 R2_D1.1@242.7,203.275
STEP_H2: R2_D2.1 U11.12 | length 10.3
  Top Layer w0.5: U11.12@235.525,186.69 237.86,186.69 239,185.55 239,185.175 ; 238.975,185.175 238.975,184.6 R2_D2.1@242.825,180.75
STEP_H3: R2_D3.1 U12.14 | length 13.3
  Top Layer w0.5: U12.14@235.336,167.792 237.345,165.783 v2(237.762,165.783)
  Bottom Layer w0.5: v2(237.762,165.783) 237.762,165.367 241.325,161.804 241.325,160.7 243.4,158.625 R2_D3.1@243.95,158.625
STEP_H4: R2_D4.1 U12.10 | length 15.5
  Top Layer w0.5: U12.10@231.744,164.2 234.319,161.625 v2(234.325,161.625)
  Bottom Layer w0.5: R2_D4.1@225.625,157.5 225.625,159.9 227.35,161.625 v2(234.325,161.625)
STEP_H5: R2_D5.1 U13.16 | length 5.8
  Top Layer w0.5: U13.16@195.595,163.45 195.595,158.055 R2_D5.1@195.85,157.8
STEP_H6: R2_D6.1 U13.10 | length 5.8
  Top Layer w0.5: R2_D6.1@186.225,158.4 186.225,159.325 187.975,161.075 U13.10@187.975,163.45
STEP_H7: R2_D7.1 U14.16 | length 11.2
  Top Layer w0.5: R2_D7.1@135.975,158.3 140.675,163 142.002,163 U14.16@144.31,165.308
STEP_H8: R2_D8.1 U14.12 | length 18.7
  Top Layer w0.5: R2_D8.1@128.8,155.55 129.5,155.55 130.9,156.95 130.9,158.685 132.525,160.31 132.525,160.707 v2(138.668,166.85) U14.12@140.718,168.9
STEP_H9: R2_D9.1 U15.14 | length 5.5
  Top Layer w0.5: v2(132.175,198.475) 134.655,198.475 U15.14@134.675,198.495
  Bottom Layer w0.5: v2@131.895,198.475 v2(132.175,198.475) 132.225,198.425 R2_D9.1@132.225,195.825
STEP_H10: R2_D10.1 U15.12 | length 5.8
  Top Layer w0.5: R2_D10.1@129.375,202.3 131.2,202.3 132.465,201.035 U15.12@134.675,201.035
term_H1: R11_D1.1 U8.8 | length 19.9
  Top Layer w0.25: U8.8@235.9,208.92 v2(238.62,208.92)
  Bottom Layer w0.25: v2(238.62,208.92) 245.62,208.92 246.075,209.375 246.075,210.559 247.491,211.975 250.525,211.975 252.85,214.3 R11_D1.1@252.925,214.3
term_H2: R11_D2.1 U8.6 | length 22
  Top Layer w0.25: U8.6@235.9,206.38 v2(238.62,206.38)
  Bottom Layer w0.25: v2(238.62,206.38) 239.947,206.38 247.652,198.675 247.7,198.675 ; R11_D2.1@253.2,195.25 249.775,198.675 247.839,198.675 ; 247.7,198.675 247.839,198.675 ; 247.7,198.675 247.839,198.675
term_H3: R11_D3.1 U8.4 | length 52.2
  Top Layer w0.25: U8.4@235.9,203.84 v2(238.535,203.84)
  Bottom Layer w0.25: v2(238.535,203.84) 237.55,204.825 237.55,206.668 238.222,207.34 239.624,207.34 247.839,199.125 248.875,199.125 249.961,199.125 250.836,198.25 253.425,198.25 254.575,197.1 ; R11_D3.1@252.925,173.025 252.925,185.15 254.575,186.8 254.575,197.1 ; 254.625,197.05 254.575,197.1
term_H4: R11_D4.1 U8.2 | length 91.4
  Top Layer w0.25: U8.2@235.9,201.3 v2(238.475,201.3)
  Bottom Layer w0.25: 237.875,207.775 236.925,206.825 236.925,202.85 v2(238.475,201.3) ; 237.875,207.79 239.81,207.79 248.025,199.575 249.55,199.575 250.148,199.575 251.023,198.7 253.611,198.7 255.1,197.211 255.1,184.111 254.925,183.936 254.925,155.325 247.625,148.025 R11_D4.1@240.15,148.025
term_H5: R11_D5.1 U9.8 | length 8.6
  Top Layer w0.5: U9.8@177.62,163.85 177.62,161.98 178.075,161.525 180.7,161.525 182.375,159.85 R11_D5.1@182.375,158.775
term_H6: R11_D6.1 U9.6 | length 7.6
  Top Layer w0.5: U9.6@175.08,163.85 175.08,162.19 177.08,160.19 178.585,160.19 179.075,159.7 R11_D6.1@179.075,158.8
term_H7: R11_D7.1 U9.4 | length 19.9
  Top Layer w0.5: R11_D7.1@157.15,155.775 163.2,155.775 167.4,159.975 170.625,159.975 172.6,161.95 U9.4@172.6,163.825 ; U9.4@172.54,163.825 U9.4@172.54,163.85
term_H8: R11_D8.1 U9.2 | length 75.4
  Top Layer w0.5: v2(162.525,160.1) 165.535,160.1 166.41,160.975 169.525,160.975 170,161.45 U9.2@170,163.85
  Bottom Layer w0.5: R11_D8.1@119.4,165.575 119.4,152.95 124.875,147.475 140.725,147.475 142.475,149.225 142.475,151.975 144.5,154 146.875,154 152.95,160.075 v2@162.625,160.075
term_H9: R11_D9.1 U10.4 | length 11.8
  Top Layer w0.5: R11_D9.1@129.925,194.225 130.85,194.225 131.475,193.6 131.475,189.116 134.131,186.46 U10.4@135.925,186.46
term_H10: R11_D10.1 U10.2 | length 33.8
  Top Layer w0.5: v2(127.075,198.5) 129.7,195.875 131,195.875 133.475,193.4 133.475,189.875 134.35,189 U10.2@135.925,189
  Bottom Layer w0.5: R11_D10.1@118.175,210.125 118.175,201.175 120.85,198.5 v2(127.075,198.5)
term_H11: U10.6
term_H12: U10.8
term_L1: R9_D1.2 R28_D1.1 U1.105 U8.10 | length 42
  Top Layer w0.25: 223.575,206.4 227.225,206.4 227.725,206.9 R9_D1.2@227.725,207.775 ; U8.10@231,207.65 227.85,207.65 R9_D1.2@227.725,207.775 ; R28_D1.1@235.75,211.725 230.5,211.725 227.725,208.95 R9_D1.2@227.725,207.775
  Top Layer w0.3: U1.105@205.925,197.65 212.75,197.65 215.455,200.355 215.455,203.53 217.275,205.35 222.525,205.35 223.575,206.4
term_L2: R9_D2.2 R28_D2.1 U1.101 U8.12 | length 48.8
  Top Layer w0.25: 216.93,199.655 216.93,201.541 217.604,202.215 222.715,202.215 224.525,204.025 227,204.025 227.725,204.75 R9_D2.2@227.725,205.133 227.748,205.11 v2(229.075,205.11) U8.12@231,205.11
  Top Layer w0.3: U1.101@205.925,195.65 212.872,195.65 214.322,197.1 214.357,197.1 216.912,199.655
  Bottom Layer w0.5: v2(229.075,205.11) 230.09,205.11 233.862,201.337 233.862,195.488 R28_D2.1@238.275,191.075
term_L3: R9_D3.2 R28_D3.1 U1.100 U8.14 | length 68.6
  Top Layer w0.25: 214.529,196.6 217.604,199.675 222.875,199.675 224.5,201.3 227.025,201.3 227.725,202 R9_D3.2@227.725,202.492 227.803,202.57 v2(229.125,202.57) U8.14@231,202.57
  Top Layer w0.3: U1.100@205.925,195.15 207.032,195.15 207.446,195.15 213.114,195.15 216.595,198.63 ; 213.629,195.7 214.529,196.6
  Bottom Layer w0.5: v2(229.125,202.57) 230.53,202.57 232.5,200.6 232.5,181.3 R28_D3.1@241.3,172.5
term_L4: R9_D4.2 R28_D4.1 U1.99 U8.16 | length 49.6
  Top Layer w0.25: 216.8,196.6 217.335,197.135 221.096,197.135 221.106,197.125 223.05,197.125 224.525,198.6 226.95,198.6 227.725,199.375 R9_D4.2@227.725,199.85 227.905,200.03 v2(229.1,200.03) U8.16@231,200.03
  Top Layer w0.3: U1.99@205.925,194.65 206.643,194.65 214.85,194.65 216.8,196.6
  Bottom Layer w0.5: v2(229.1,200.03) 230.775,198.355 230.775,180.175 R28_D4.1@231.8,179.15
term_L5: R9_D5.2 R28_D5.1 U1.44 U9.10 | length 54
  Top Layer w0.3: R9_D5.2@177.6,171.95 178.025,171.95 179.05,172.975 179.05,174.625 180.45,176.025 188.164,176.025 190.075,177.936 U1.44@190.075,179.8
  Top Layer w0.5: U9.10@176.35,168.75 176.45,168.85 176.45,170.8 R9_D5.2@177.6,171.95 ; R9_D5.2@177.775,171.8 v2(178.95,171.8) ; v2(204.325,163.875) R28_D5.1@207.025,163.875
  Bottom Layer w0.5: v2(178.95,171.8) 180.2,170.55 196.7,170.55 203.375,163.875 v2(204.325,163.875)
term_L6: R9_D6.2 R28_D6.1 U1.43 U9.12 | length 27.3
  Top Layer w0.3: R9_D6.2@174.925,171.95 175.225,171.95 176.275,173 176.275,175.925 176.875,176.525 187.957,176.525 189.575,178.143 U1.43@189.575,179.8
  Top Layer w0.5: U9.12@173.81,168.75 v2@173.81,170.725 ; v2(174.125,170.725) 174.125,171.15 R9_D6.2@174.925,171.95
  Bottom Layer w0.5: v2(174.125,170.725) 174.175,170.675 R28_D6.1@174.175,167.575
term_L7: R9_D7.2 R28_D7.1 U1.42 U9.14 | length 45.2
  Top Layer w0.3: R28_D7.1@155.907,163.15 R28_D7.1@155.929,163.171 ; R28_D7.1@156,163.1 161.275,163.1 164.95,166.775 170.7,166.775 171.27,167.345 U9.14@171.27,168.75 ; R9_D7.2@172.075,171.95 172.475,171.95 173.45,172.925 173.45,176.375 174.1,177.025 187.75,177.025 189.075,178.35 U1.42@189.075,179.8
  Top Layer w0.5: U9.14@171.27,168.75 171.27,171.345 R9_D7.2@171.988,172.063
term_L8: R9_D8.2 R28_D8.1 U1.39 U9.16 | length 42.7
  Top Layer w0.3: R28_D8.1@156,165.8 163.268,165.8 164.743,167.275 167.255,167.275 U9.16@168.73,168.75 ; R9_D8.2@169.4,171.95 R9_D8.2@169.9,172.45 ; R9_D8.2@169.45,171.95 169.875,171.95 170.7,172.775 170.7,176.75 171.475,177.525 186.707,177.525 187.575,178.393 U1.39@187.575,179.8
  Top Layer w0.5: U9.16@168.73,168.75 168.73,171.28 R9_D8.2@169.4,171.95
term_L9: R9_D9.2 R28_D9.1 U1.144 U10.14 | length 69.2
  Top Layer w0.3: R9_D9.2@144.25,187.7 144.25,187 144.95,186.3 147.725,186.3 150.5,189.075 150.5,190.243 153.332,193.075 163.625,193.075 166.96,196.41 166.915,196.455 166.96,196.499 166.96,204.803 167.45,205.293 186.057,205.293 186.575,204.775 U1.144@186.575,201
  Top Layer w0.5: U10.14@140.825,187.73 v1(142.725,187.73) 144.22,187.73 R9_D9.2@144.25,187.7
  Bottom Layer w0.5: R28_D9.1@137.85,187.875 137.995,187.73 v1(142.725,187.73)
term_L10: R9_D10.2 R28_D10.1 U1.143 U10.16 | length 68.5
  Top Layer w0.25: R9_D10.2@144.17,190.27 R9_D10.2@144.25,190.35
  Top Layer w0.3: U10.16@140.825,190.27 v1(142.725,190.27) ; R9_D10.2@144.25,190.35 144.25,190.025 145.275,189 148.55,189 153.125,193.575 163.328,193.575 166.46,196.707 166.46,205.01 167.243,205.793 186.857,205.793 187.075,205.575 U1.143@187.075,201
  Top Layer w0.5: v1(142.725,190.27) R9_D10.2@144.17,190.27
  Bottom Layer w0.5: R28_D10.1@137.875,190.55 138.155,190.27 v1(142.725,190.27)
term_L11: U10.12
term_L12: U10.10
USBD_N: C35.2 CN1.2 R19.2 | length 9.9
  Top Layer w0.381: C35.2@153.5,209.725 154.875,209.725 R19.2@156.675,207.925 156.675,209.825 158.77,211.92 CN1.2@158.77,213.065
USBD_P: C34.2 CN1.3 R18.2 | length 11.5
  Top Layer w0.381: CN1.3@158.77,215.065 159.11,215.065 160.275,213.9 160.275,211.325 159.625,210.675 R18.2@159.625,207.925 161.575,209.875 C34.2@162.1,209.875
VCCIO: R6.2 R17.2 | length 2.6
  Bottom Layer w0.3: R6.2@166.375,189.175 166.4,189.2 R17.2@166.4,191.8
pads on no net: CN1.5 CN1.6 CN2.2 CN2.3 CN2.4 CN2.5 CN2.6 CN2.7 CN2.8 CN2.9 CN2.10 CN2.11 CN2.12 CN2.13 CN2.14 CN2.15 CN2.16 CN2.17 CN2.18 CN3.2 CN3.MH1 CN3.MH2 JTAG.2 JTAG.6 JTAG.7 JTAG.8 RESET.2 RESET.4 U1.1 U1.2 U1.3 U1.7 U1.10 U1.11 U1.24 U1.25 U1.52 U1.53 U1.54 U1.55 U1.58 U1.59 U1.66 U1.68 U1.69 U1.70 U1.71 U1.87 U1.88 U1.89 U1.90 U1.91 U1.106 U1.110 U1.111 U1.112 U1.113 U1.114 U1.115 U1.119 U1.120 U1.121 U1.127 U1.128 U1.132 U1.145 U2.2 U2.6 U2.15 U2.16 U3.3 U3.4 U3.5 U3.6 U3.11 U3.12 U3.13 U3.14 U4.1 U5.4 U6.4 U7.4 U10.13
copper on no net:
  other v1: 193.525,188.6 194.725,188.6 195.925,188.6 197.125,188.6 193.525,189.8 194.725,189.8 195.925,189.8 197.125,189.8 193.525,191 194.725,191 195.925,191 197.125,191 193.525,192.2 194.725,192.2 195.925,192.2 197.125,192.2

## Polygon pours and split planes (outlines as drawn)
GND_H on Bottom Layer "Top Layer-No Net" (solid, pour order 4): 229.675,165.8 229.675,165.925 234.806,171.1 234.78,212.1 215.2,212.1 215.2,227.9 242.5,227.9 258.475,227.9 258.475,142.9 113.475,142.9 113.475,227.9 113.5,227.875 135.8,227.875 135.8,175.075 145.05,165.825 146.9,165.8
GND on Bottom Layer "Top Layer-No Net" (solid, pour order 8): 232.9,172.825 232.9,172.8 227.6,167.5 147.225,167.5 146.544,167.5 137.81,176.234 137.949,227.9 210.075,227.9 209.7,227.525 209.7,210.8 227.4,210.8 232.9,205.3
GND_H on Top Layer "Top Layer-No Net" (solid, pour order 6): 232.5,165.3 235.275,168.075 235.275,212.101 215.2,212.101 215.2,227.9 242.5,227.9 258.525,227.9 258.525,142.9 113.525,142.9 113.525,227.9 113.55,227.875 136.05,227.875 136.05,175.7 146.45,165.3
GND on Top Layer "Top Layer-No Net" (solid, pour order 10): 232.925,172.825 227.6,167.5 146.575,167.5 137.841,176.234 137.81,176.234 137.948,227.9 210.075,227.9 209.7,227.525 209.7,210.8 232.925,210.8

## Silkscreen, mask and mechanical layers (free items; w line width, h text height)
Top Overlay:
  lines w0.254: 448.175,210.025 448.175,155 370.812,155 328.175,155 328.175,210.05 448.175,210.05 ; 113.475,142.9 137.913,142.9 227.538,142.9 258.475,142.9 258.475,227.9 113.475,227.9 113.475,142.9
  text "Murinets" at 128.679,225.284 h1.52
  text "murinets.d@ya.ru" at 128.684,223.44 h1.2 r359.57
  text "Motor ctrl v2.0, 2017" at 128.684,221.634 h1

## Dimensions
258.475,227.9 to 258.475,142.9 on Top Overlay
258.475,227.9 to 113.475,227.9 on Top Overlay
448.175,210.05 to 448.175,155 on Top Overlay
448.175,210.6 to 328.175,210.05 on Top Overlay
256.475,224.725 to 256.475,145.925 on Top Overlay
256.475,224.725 to 115.875,224.725 on Top Overlay

## Text inside footprints (layer, text, board x,y; h text height)
CN2: Top Overlay "2" at 218.83,175.33 h1.5 r90; Top Overlay "1" at 221.37,175.83 h1.5 r90; Top Overlay "20" at 218.83,208.02 h1.5 r90; Top Overlay "19" at 221.37,208.02 h1.5 r90
JTAG: Top Overlay "9" at 162.545,190.755 h1.5 r90; Top Overlay "10" at 160.005,190.755 h1.5 r90; Top Overlay "1" at 162.545,177.695 h1.5 r90; Top Overlay "2" at 160.005,177.195 h1.5 r90